# EAGLE board shrew-rx (EAGLE 7.6.0)
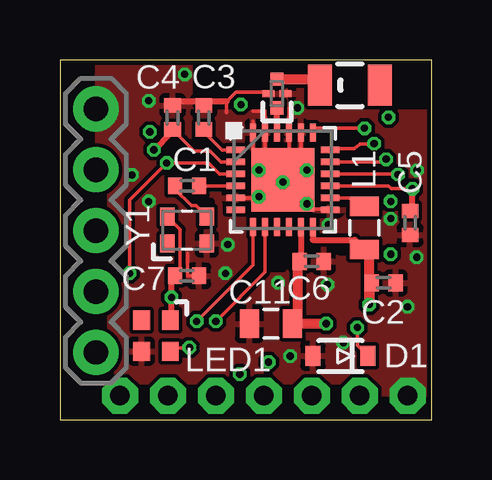
[diagram p0: board, top side]
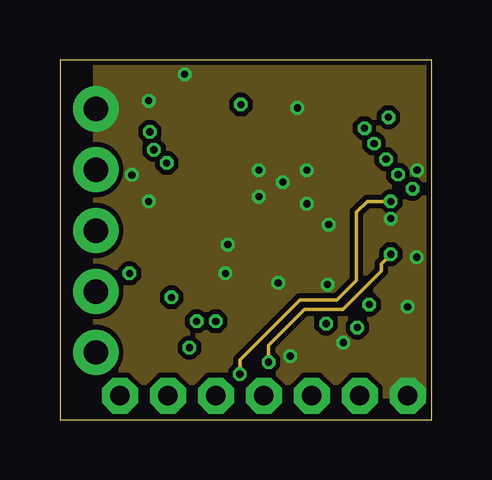
[diagram p1: board, inner layer Route2]
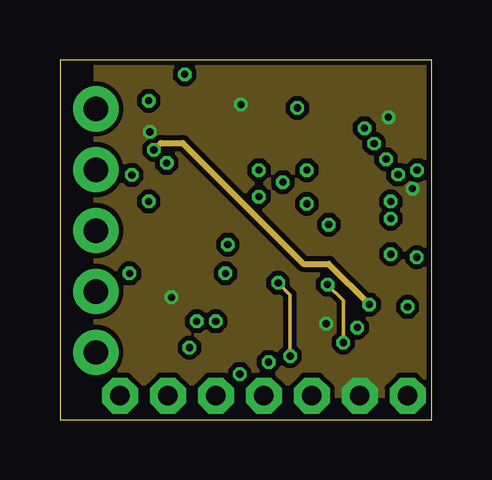
[diagram p2: board, inner layer Route15]
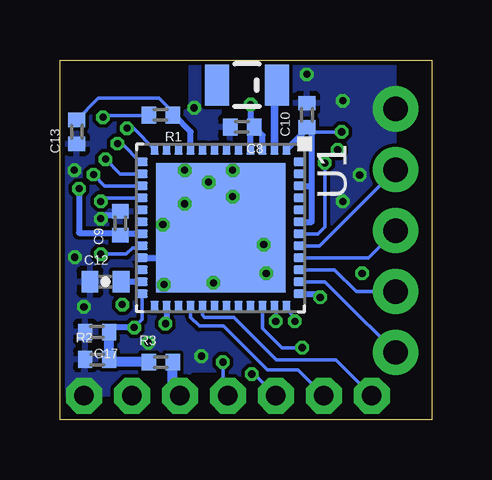
[diagram p3: board, bottom side, seen from below]

Size 15.5 x 15 mm. Coordinates in mm from the lower left corner, seen from the top.
Outline: 0,0 15.5,0 15.5,15 0,15 0,0
Copper layers (1+2*15+16): Top 0.035mm / dielectric 0.2mm / Route2 0.0175mm / dielectric 1.065mm / Route15 0.0175mm / dielectric 0.2mm / Bottom 0.035mm
Design rules "jlcpcb-4layers": minimum track width 3.5mil, minimum drill 0.2mm, track to track 5mil, track to pad 5mil, pad to pad 5mil, via to via 5mil, smd to smd 5mil, copper to edge 0.2mm, drill to drill 6mil, minimum pad ring 10mil, minimum via ring 0.13mm, stop-mask expansion 0.05mm, vias tented up to drill 16mil, thermal gap 8mil
tRestrict: area 11.1,13.1 to 12.9,14.8; area 5.7,13.1 to 8.6,15; area 12.9,13.1 to 15.3,14.8; 8 lines
bRestrict: area 10.3,13.1 to 13.9,14.8; 6 lines
vRestrict: area 10.3,13.1 to 13.9,14.8; area 5.7,13.4 to 9.5,15; area 13.9,13.1 to 15.3,14.8; 2 lines

## Footprints (pad centres in the part's own frame; a part is rotated, then mirrored left to right if it is on the bottom)
ANTENNA-CHIP2 = smd 1.7 x 1: ? 0,-1.25; FEED 0,1.25
0402-REV = smd 0.6 x 0.7: 1 -0.5,0; 2 0.5,0
0805 = smd 0.8 x 1.2: 1 -0.9,0; 2 0.9,0
0402-CAP = smd 0.7 x 0.9: 1 -0.65,0; 2 0.65,0
SOD-323 = smd 0.63 x 0.83: 1 -1.15,0; 2 1.15,0
1X07-2MM-TH = drill 0.8 pad 1.5 octagon: 1 -6,0; 2 -4,0; 3 -2,0; 4 0,0; 5 2,0; 6 4,0; 7 6,0
1X05 = drill 1.016 pad 1.88: 1 0,0; 2 2.54,0; 3 5.08,0; 4 7.62,0; 5 10.16,0
FIL_2450FM07D0034T = smd 0.55 x 0.55: 1 -0.6,0; 3 0.6,0 | smd 0.3 x 0.5: 2 0,-0.35; 4 0,0.35
SK6812-EC20 = smd 0.8 x 0.7: 1 0.65,-0.6; 2 0.65,0.6; 3 -0.65,0.6; 4 -0.65,-0.6
PQFN50P700X700X104-49N = smd 0.45 x 0.35: 1 -3.265,2.75; 2 -3.265,2.25; 3 -3.265,1.75; 4 -3.265,1.25; 5 -3.265,0.75; 6 -3.265,0.25; 7 -3.265,-0.25; 8 -3.265,-0.75; 9 -3.265,-1.25; 10 -3.265,-1.75; 11 -3.265,-2.25; 12 -3.265,-2.75; 25 3.265,-2.75; 26 3.265,-2.25; 27 3.265,-1.75; 28 3.265,-1.25; 29 3.265,-0.75; 30 3.265,-0.25; 31 3.265,0.25; 32 3.265,0.75; 33 3.265,1.25; 34 3.265,1.75; 35 3.265,2.25; 36 3.265,2.75 | smd 0.35 x 0.45: 13 -2.75,-3.265; 14 -2.25,-3.265; 15 -1.75,-3.265; 16 -1.25,-3.265; 17 -0.75,-3.265; 18 -0.25,-3.265; 19 0.25,-3.265; 20 0.75,-3.265; 21 1.25,-3.265; 22 1.75,-3.265; 23 2.25,-3.265; 24 2.75,-3.265; 37 2.75,3.265; 38 2.25,3.265; 39 1.75,3.265; 40 1.25,3.265; 41 0.75,3.265; 42 0.25,3.265; 43 -0.25,3.265; 44 -0.75,3.265; 45 -1.25,3.265; 46 -1.75,3.265; 47 -2.25,3.265; 48 -2.75,3.265 | smd 5.4 x 5.4: 49 0,0
QFN24_4X4_SEM = smd 0.762 x 0.254: 1 -1.968,1.25; 2 -1.968,0.75; 3 -1.968,0.25; 4 -1.968,-0.25; 5 -1.968,-0.75; 6 -1.968,-1.25; 13 1.968,-1.25; 14 1.968,-0.75; 15 1.968,-0.25; 16 1.968,0.25; 17 1.968,0.75; 18 1.968,1.25 | smd 0.254 x 0.762: 7 -1.25,-1.968; 8 -0.75,-1.968; 9 -0.25,-1.968; 10 0.25,-1.968; 11 0.75,-1.968; 12 1.25,-1.968; 19 1.25,1.968; 20 0.75,1.968; 21 0.25,1.968; 22 -0.25,1.968; 23 -0.75,1.968; 24 -1.25,1.968 | smd 2.642 x 2.642: 25 0,0
OSC_TG2016SMN_50.0000M-ECGNNMB = smd 0.75 x 0.6: 1 -0.565,0.825; 2 -0.565,-0.825; 3 0.565,-0.825; 4 0.565,0.825

## Placement (x,y rotation side)
ANT1  74889302450  [ANTENNA-CHIP2]  7.7,13.95 270 bottom
ANT2  74889302450  [ANTENNA-CHIP2]  12.1,13.95 90 top
C1  1n  [0402-REV]  5.3,9.75 0 top
C2  470n  [0402-REV]  13.5,5.7 180 top
C3  10n  [0402-REV]  6,12.6 270 top
C4  10n  [0402-REV]  4.7,12.6 270 top
C5  100n  [0402-REV]  14.6,8.2 90 top
C6  100n  [0402-REV]  10.5,6.6 180 top
C7  100n  [0402-REV]  5.3,6 180 top
C8  100n  [0402-REV]  7.9,12.2 180 bottom
C9  100n  [0402-REV]  12.98,8.18 90 bottom
C10  100n  [0402-REV]  5.2,12.7 90 bottom
C11  10uF 25V  [0805]  8.8,4 180 top
C12  DNP  [0402-CAP]  13.6,5.75 0 bottom
C13  470n  [0402-REV]  14.8,12 90 bottom
C17  470n  [0402-REV]  13.95,3.65 180 bottom
D1  3V6  [SOD-323]  11.7,2.65 180 top
EDGE1  [1X07-2MM-TH]  8.5,1 0 top
EDGE2  [1X05]  1.5,2.8 90 top
FL1  2450FM07D0034T  [FIL_2450FM07D0034T]  9.05,13.6 90 top
L1  15u  [0805]  12.7,8 90 top
LED1  SK6812-EC20  [SK6812-EC20]  4,3.5 90 top
R1  10K  [0402-REV]  11.3,12.7 180 bottom
R2  10K  [0402-REV]  13.95,2.51 0 bottom
R3  10K  [0402-REV]  11.3,2.4 0 bottom
U1  ESP32-PICO-D4  [PQFN50P700X700X104-49N]  8.8,8 270 bottom
U2  SX1280IMLTRT  [QFN24_4X4_SEM]  9.3,10 0 top
Y1  52MHz TCXO  [OSC_TG2016SMN_50.0000M-ECGNNMB]  5.3,7.9 90 top

## Library data of the parts
ANT1 ANT2 C1-C13 C17 D1 EDGE1 EDGE2 L1 R1-R3 Y1 = shrew-common
FL1 = shrew-core; AVAILABILITY: In Stock; CHECK_PRICES: https://www.snapeda.com/parts/2450FM07D0034T/Johanson+Technology+Inc./view-part/?ref=eda; DESCRIPTION: 2.4GHz ~ 2.5GHz Frequency - RF Filter (Radio Frequency) 100MHz Bandwidth 0.75dB 0402 (1005 Metric), 4 PC Pad; MF: Johanson Technology Inc.; MP: 2450FM07D0034T; PACKAGE: 0402 Johanson Technology Inc.; PRICE: None; SNAPEDA_LINK: https://www.snapeda.com/parts/2450FM07D0034T/Johanson+Technology+Inc./view-part/?ref=snap
LED1 = shrew-core
U1 = shrew-core; AVAILABILITY: In Stock; CHECK_PRICES: https://www.snapeda.com/parts/ESP32-PICO-D4/Espressif+Systems/view-part/?ref=eda; DESCRIPTION: Bluetooth, WiFi 802.11b/g/n, Bluetooth v4.2 +EDR, Class 1, 2 and 3 Transceiver Module 2.4GHz ~ 2.5GHz - Surface Mount; MF: Espressif Systems; MP: ESP32-PICO-D4; PACKAGE: SMD-48 Espressif Systems; PRICE: None; SNAPEDA_LINK: https://www.snapeda.com/parts/ESP32-PICO-D4/Espressif+Systems/view-part/?ref=snap
U2 = shrew-core; COPYRIGHT: Copyright (C) 2024 Ultra Librarian. All rights reserved.; MANUFACTURER_PART_NUMBER: SX1280IMLTRT; MFR_NAME: Semtech

## Nets
3.3V: C5.2 C6.2 C7.2 C8.1 C9.1 C10.1 C11.1 EDGE1.6 LED1.1 R1.2 U1.1 U1.3 U1.4 U1.19 U1.26 U1.37 U1.43 U1.46 U2.11 U2.15 Y1.4
AUX1: EDGE2.1 U1.38
AUX2: EDGE2.2 U1.39
BATT-ADC: C17.1 D1.1 R2.2 R3.1 U1.24
ESP-BOOT: C12.2 U1.23
ESP-EN: C13.2 R1.1 U1.9
GND: C2.1 C3.1 C4.1 C5.1 C6.1 C7.1 C8.2 C9.2 C10.2 C11.2 C12.1 C13.1 C17.2 D1.2 EDGE1.7 EDGE2.5 FL1.2 FL1.4 LED1.3 R2.1 U1.21 U1.49 U2.5 U2.13 U2.20 U2.21 U2.23 U2.24 U2.25 Y1.2
N$1: ANT1.FEED U1.2
N$2: C1.1 Y1.3
N$3: C1.2 U2.4
N$5: U1.17
N$6: FL1.1 U2.22
N$7: ANT2.FEED FL1.3
N$8: U1.22
N$9: L1.2 U2.14
N$11: C3.2 U2.1
RADIO-BUSY: U1.36 U2.7
RADIO-CS: U1.12 U2.19
RADIO-DIO: U1.35 U2.8
RADIO-RST: U1.42 U2.3
RADIO-VDD: C2.2 C4.2 L1.1 U2.2 U2.12
RGBLED: LED1.4 U1.34
SIG1: EDGE1.4 U1.20
SIG2: EDGE1.3 U1.16
SIG3: EDGE1.2 U1.28
SIG4: EDGE1.1 U1.29
SPI-MISO: U1.15 U2.16
SPI-MOSI: U1.14 U2.17
SPI-SCK: U1.13 U2.18
U0RXD: EDGE2.3 U1.40
U0TXD: EDGE2.4 U1.41
V-ADC: EDGE1.5 R3.2

## Tracks (layer width: path | path; a pad name or v marks a point on that pad's centre or on a via)
3.3V  (via drill 0.3)
  Top 0.152: Y1.4 5.02,7.92 5.02,6 C7.2 | U2.15 13.7,9.75 13.82,9.63 v14.7,9.63
  Top 0.254: U2.11 10.05,6.9 C6.2 | 4.47,8.5 Y1.4 | LED1.1 4.65,4.2 v4.65,5.1 4.65,6 C7.2 | C5.2 14.7,8.7 v14.7,9.63
  Top 0.406: v11.1,4 9.85,4 9.85,4.15 C11.1 9.91,4 9.91,6.51 C6.2
  Bottom 0.152: v3.75,12 5,12 5.06,12 | v13.7,12.61 13.64,12.67 11.8,12.67 R1.2
  Bottom 0.254: U1.3 7.05,11.85 C8.1 | U1.4 7.55,11.9 C8.1 | v7.55,13.14 7.55,12.6 C8.1 | U1.1 5.27,12.05 C10.1 5,12.05 5,12 5,9.75 | U1.46 5,9.75 | U1.43 5,8.25 5,9.75 | U1.37 4.65,5.25 v4.65,5.1 | v14.7,9.63 14.7,7.79 12.98,7.79 C9.1 12.98,7.75 U1.19 | U1.26 11.05,4.05 v11.1,4
  pour Route15 (isolate 0.203, no thermals): 1.5,1 1.5,15 15.5,15 15.5,1
AUX1
  Bottom 0.152: U1.38 4.45,5.75 3.8,5.1 EDGE2.1
AUX2
  Bottom 0.152: U1.39 4.05,6.25 3.14,5.34 EDGE2.2
BATT-ADC  (via drill 0.3)
  Top 0.152: D1.1 12.4,3.1 v12.4,3.84
  Bottom 0.152: v12.4,3.84 12.06,4.17 U1.24
  Bottom 0.254: v12.4,3.84 13.45,3.84 C17.1
  Bottom 0.406: C17.1 R2.2 13.2,2.4 R3.1
ESP-BOOT
  Bottom 0.152: C12.2 12.9,5.75
  Bottom 0.254: U1.23 12.9,5.75
ESP-EN
  Bottom 0.152: C13.2 13.9,13.4 11.36,13.4 10.8,12.84 R1.1
  Bottom 0.254: U1.9 10.05,12 10.75,12.7 R1.1
GND  (via drill 0.3)
  Top 0.152: v9.9,13 9.55,13 U2.21 | 5.33,6.93 5.33,6 5.69,6 | U2.5 9.3,9.25 U2.25 | 11.14,8.78 9.3,8.78 U2.25 | 10.05,11.79 10.05,10 U2.25 | U2.21 9.55,10 U2.25 | U2.25 8.55,10 U2.23 8.55,12.87 8.05,12.87 | 8.05,12.45 8.05,10 U2.25 | 8.74,13.66 7.34,13.66 6.95,13.27 6.95,12.8 | U2.21 9.55,10.4 v10.3,10.4
  Top 0.254: 6.95,13.27 6,13.27 | 6,13.27 4.77,13.27 | C3.1 6,13.27
  Route15 0.152: v11.16,5.62 11.82,4.96 v11.82,3.21 | v9.6,2.65 9.6,5.2 v9.11,5.69
  Bottom 0.152: U1.49 9.3,8.5 v9.3,9.9
  Bottom 0.254: U1.21 11.16,6.75 v11.16,5.63 | C9.2 13.15,8.51 13.8,8.51 v13.8,8.38
  other vias: 11.21,8.13 14.88,6.77 8.3,10.4 8.3,9.3 10.3,9 7,7.3 6.9,6.1 3.7,9.1 3.7,13.3 5.2,14.4 14.9,10.4 14.5,4.7 3,10.2
  pour Top (isolate 0.152, rank 5): 1.5,1 1.5,15 15.5,15 15.5,1
  pour Bottom (isolate 0.152, rank 5): 1.5,1 1.5,15 15.5,15 15.5,1
  pour Top (isolate 0.152, no thermals): 13.1,1 13.1,2.2 15.5,2.2 15.5,1
  pour Route2 (isolate 0.203, no thermals): 1.5,1 1.5,15 15.5,15 15.5,1
  pour Top (isolate 0.152, no thermals): 1.5,15 1.5,10.5 2.8,10.5 2.8,15
  pour Bottom (isolate 0.152, no thermals): 1.5,15 2.8,15 2.8,12.3 2.8,10.5 1.5,10.5
  pour Bottom (isolate 0.152, no thermals): 15.5,0.9 15.5,1.9 13.1,1.9 13.1,0.9
N$1
  Bottom 0.305: U1.2 6.55,13.95 ANT1.FEED
N$2
  Top 0.152: Y1.3 5.67,8.92 5.48,8.92 4.8,9.6 C1.1
N$3
  Top 0.152: C1.2 U2.4
N$6
  Top 0.25: U2.22 FL1.1
N$7
  Top 0.406: FL1.3 10.85,14.2 ANT2.FEED
N$9
  Top 0.152: U2.14 12.3,9.25 L1.2
N$11
  Top 0.152: U2.1 6.75,11.25 6.05,11.95 C3.2
RADIO-BUSY  (via drill 0.3)
  Top 0.152: U2.7 8.05,6.45 v5.7,4.1
  Bottom 0.152: v5.7,4.1 5.82,4.22 5.73,4.29 6.05,4.61 U1.36
RADIO-CS  (via drill 0.3)
  Top 0.152: v12.7,12.15 10.55,12.15 U2.19
  Bottom 0.152: U1.12 12.44,12.15 v12.7,12.15
RADIO-DIO  (via drill 0.3)
  Top 0.152: U2.8 8.55,6.15 v6.5,4.1
  Bottom 0.152: U1.35 6.5,4.73 v6.5,4.1
RADIO-RST  (via drill 0.3)
  Top 0.152: U2.3 6.65,10.25 6.2,10.7 v4.45,10.7 2.9,9.15 v2.9,6.1
  Bottom 0.152: U1.42 4.74,7.75 4.45,8.04 v4.45,10.7
RADIO-VDD  (via drill 0.3)
  Top 0.152: U2.2 6.71,10.75 6.26,11.2 5.6,11.2 C4.2 4.7,11.97 4.64,11.97
  Top 0.254: 12.5,7.1 L1.1 12.3,7.5 10.55,7.5 U2.12 | v3.92,11.25 4.64,11.97
  Top 0.406: L1.1 12.9,7.1 v12.9,4.8 12.9,5.7 C2.2
  Route15 0.254: v3.92,11.25 4.2,11.53 5.12,11.53 10.15,6.5 11.2,6.5 v12.9,4.8
RGBLED  (via drill 0.3)
  Top 0.152: LED1.4 4.75,3 v5.4,3
  Bottom 0.152: v5.4,3 6.25,3 7.05,3.8 U1.34
SIG1  (via drill 0.3)
  Route2 0.152: v8.7,2.4 8.7,3.1 10.2,4.6 11.8,4.6 13.4,6.2 13.4,6.5 v13.8,6.9
  Bottom 0.152: v13.8,6.9 12.73,6.9 12.46,7.16 12.06,7.16 U1.20 | v8.7,2.4 8.7,1.2 EDGE1.4
SIG2  (via drill 0.3)
  Route2 0.152: v7.5,1.9 7.5,2.5 10,5 11.56,5 12.36,5.8 12.36,8.65 12.81,9.1 v13.8,9.1
  Bottom 0.152: U1.16 13.65,9.25 v13.8,9.1 | v7.5,1.9 7.4,1.9 EDGE1.3
SIG3
  Bottom 0.152: EDGE1.2 5.57,2.07 6.85,2.07 8.68,3.9 9.68,3.9 10.05,4.27 U1.28
SIG4
  Bottom 0.152: EDGE1.1 3.98,2.48 6.46,2.48 8.25,4.27 9.46,4.27 9.55,4.36 U1.29
SPI-MISO  (via drill 0.3)
  Top 0.152: U2.16 14.07,10.25 v14.1,10.22
  Bottom 0.152: U1.15 13.63,9.75 v14.1,10.22
SPI-MOSI  (via drill 0.3)
  Top 0.152: U2.17 13.49,10.75 v13.6,10.86
  Bottom 0.152: U1.14 12.99,10.25 v13.6,10.86
SPI-SCK  (via drill 0.3)
  Top 0.152: U2.18 11.55,11.25 11.6,11.3 12.29,11.3 12.5,11.5 v13.09,11.5 arc90 v13.1,11.51
  Bottom 0.152: U1.13 12.15,10.75 12.91,11.51 v13.1,11.51
U0RXD
  Bottom 0.152: U1.40 2.63,6.75 EDGE2.3
U0TXD
  Bottom 0.152: U1.41 4.67,7.25 3.6,8.32 EDGE2.4
V-ADC
  Bottom 0.406: EDGE1.5 10.8,1 R3.2